# Altium PCB TP-EVALBOARD-R01.PcbDoc (part 1 of 2)
Units mm, origin at the board's own origin, x right, y up, seen from the top; angles counter-clockwise.
Board outline 100.28 x 49.1 mm, 2 copper layers (Top Layer, Bottom Layer), stack 1.695 mm thick; 77 components, 72 nets, 330 pads, 183 vias.
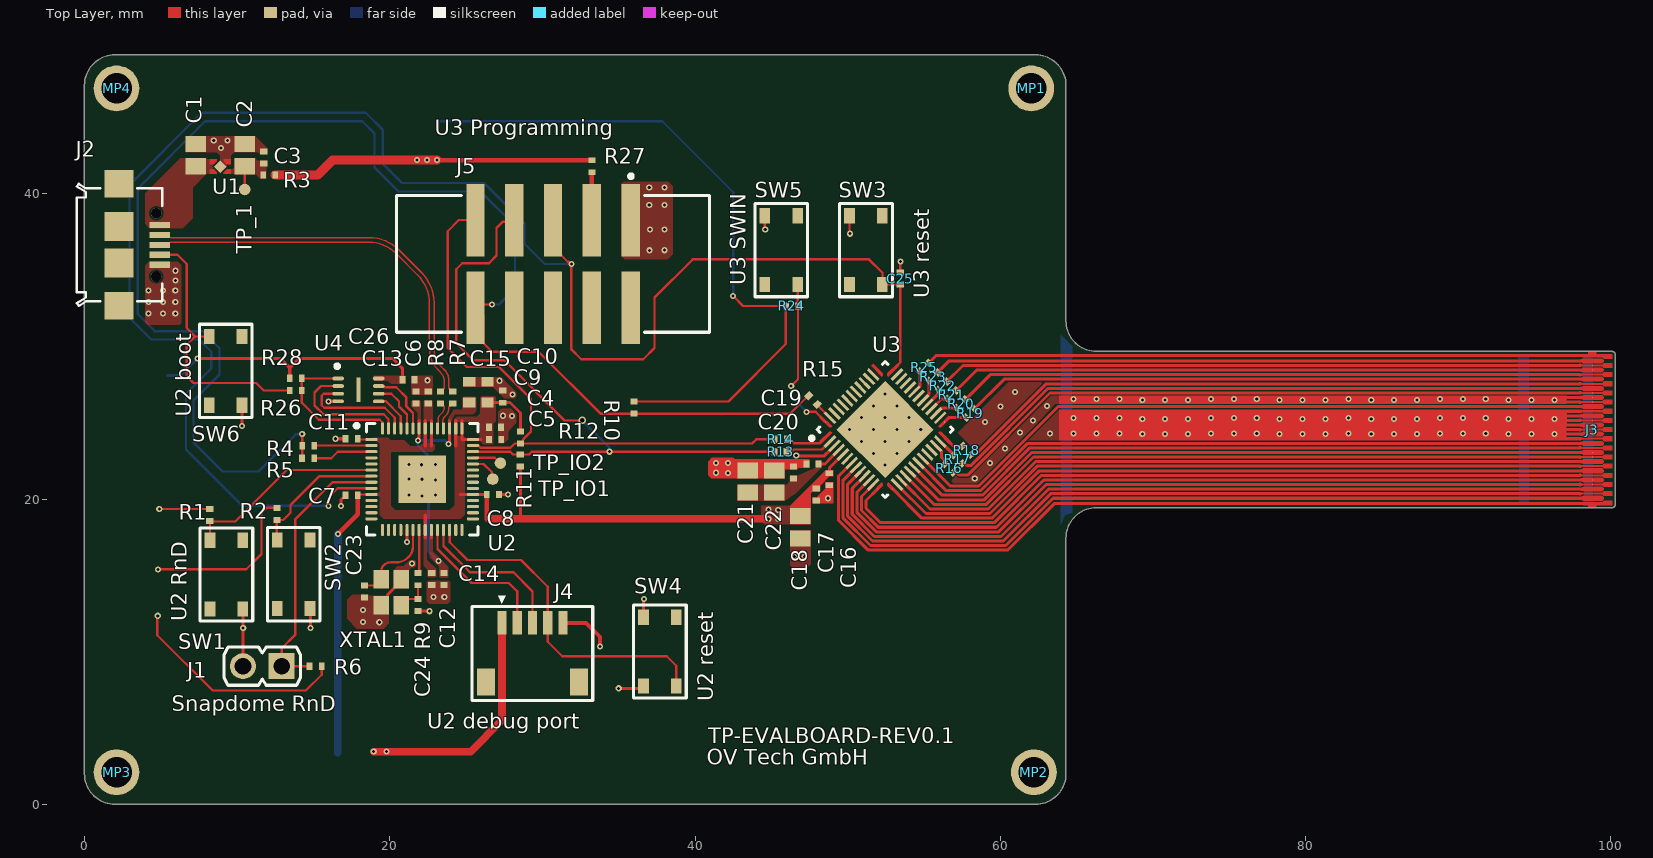
[diagram p0: Top Layer view]
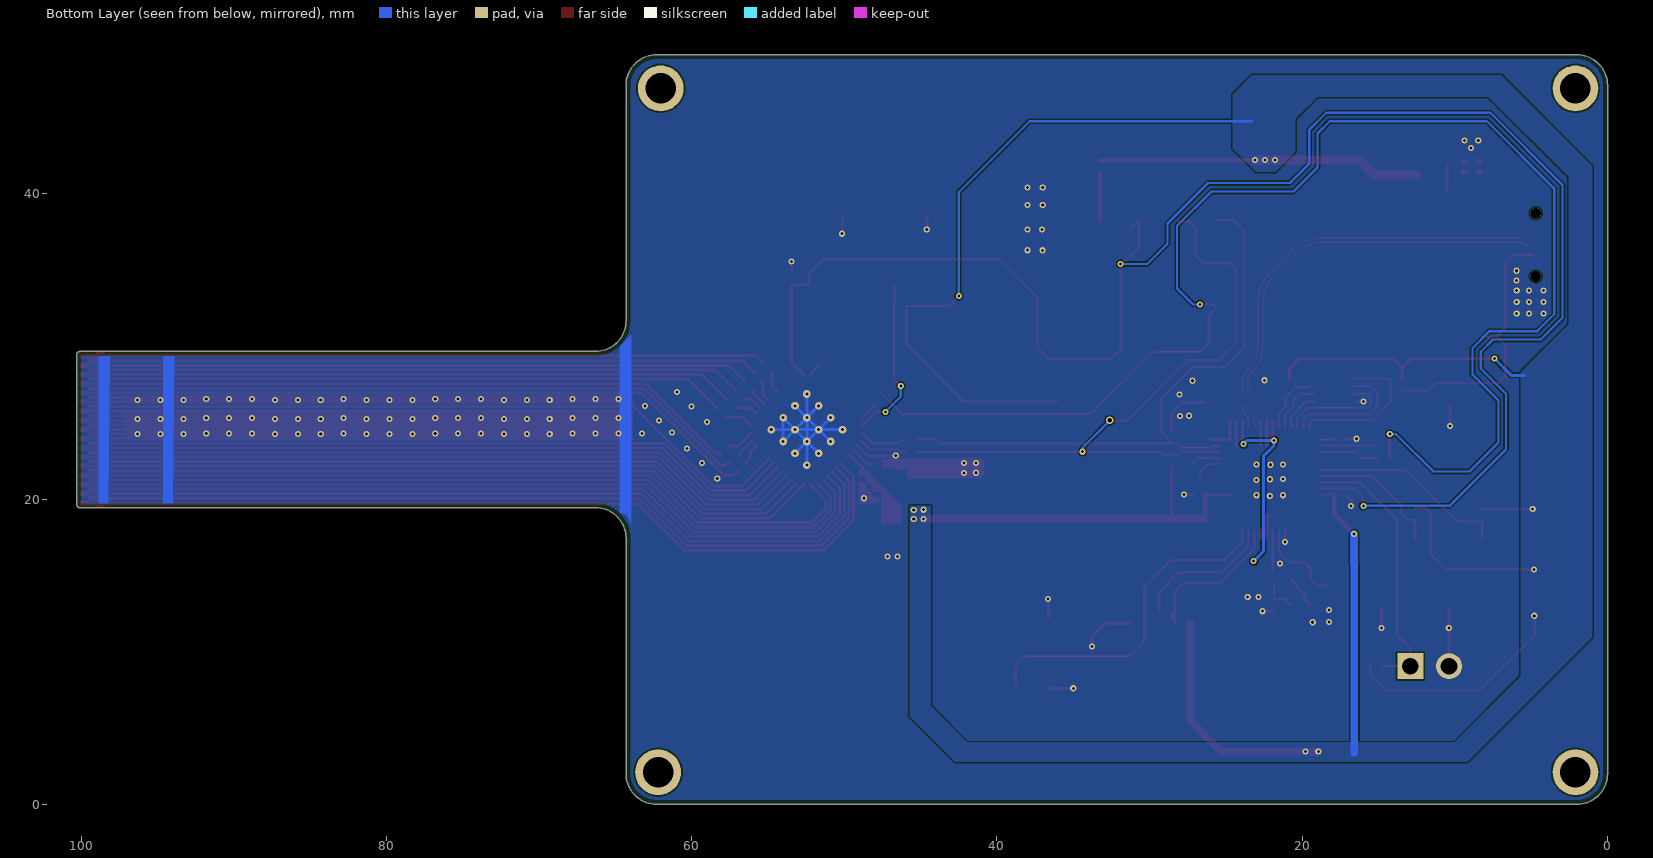
[diagram p1: Bottom Layer view, seen from below]
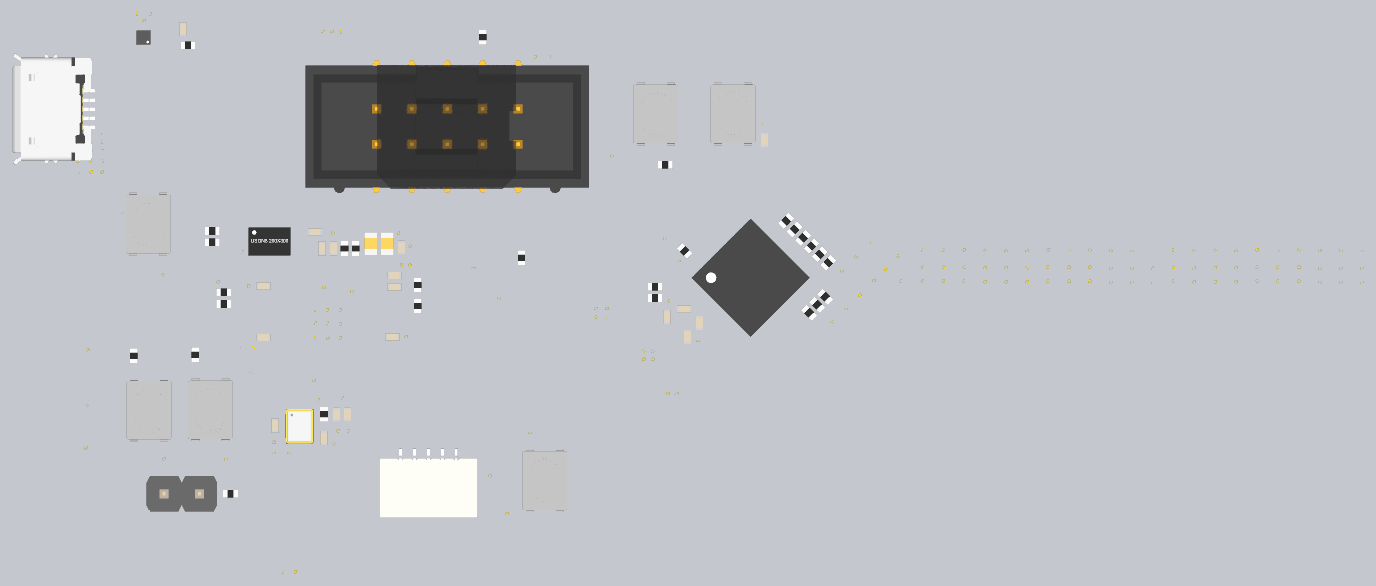
[diagram p3: 3D render of the assembled board from above, using the file's embedded part models]

## Layer stack, top to bottom
Polyimide Top: solder mask 0.025, FC-001, Dk 2.9
Adhesive Top: prepreg 0.25, PP-023, Dk 4.5
Top Layer: signal copper 0.035
Polyimide Core: core 0.025, Core-009, Dk 3.3
Bottom Layer: signal copper 0.035
Adhesive Bottom: prepreg 0.25, PP-023, Dk 4.5
Polyimide Bottom: solder mask 0.025, FC-001, Dk 2.9
Polyimide Stiffener: core 0.1, Core-009, Dk 4.5
FR4 Stiffener: core 1, Core-009, Dk 4.1

## Board outline
100.157,19.445 ccw(c100.08,19.63) 100.28,19.63 100.28,29.47 ccw(c100.08,29.47) 100.08,29.67 94.3,29.67 66.3,29.67 cw(c66.3,31.67) 64.3,31.67 64.3,47.1 ccw(c62.3,47.1) 62.3,49.1 2,49.1 ccw(c2,47.1) 0,47.1 0,2 ccw(c2,2) 2,0 62.3,0 ccw(c62.3,2) 64.3,2 64.3,17.43 cw(c66.3,17.43) 64.7,18.63 cw(c66.3,17.43) 66.3,19.43 94.297,19.43 98.53,19.43 100.08,19.43 ccw(c100.08,19.63)
board region "FFC Cable connector": 94.297,19.43 98.53,19.43 100.08,19.43 100.12,19.43 100.193,19.46 100.25,19.517 100.28,19.59 100.28,19.63 100.28,29.47 100.28,29.51 100.25,29.583 100.193,29.64 100.12,29.67 100.08,29.67 94.3,29.67
board region "FFC Cable": 66.3,19.43 94.297,19.43 94.3,29.67 66.3,29.67 66.104,29.68 65.719,29.756 65.357,29.906 65.031,30.124 64.754,30.401 64.536,30.727 64.386,31.089 64.31,31.474 64.3,31.67 64.3,17.43 64.31,17.626 64.386,18.011 64.536,18.373 64.754,18.699 65.031,18.976 65.357,19.194 65.719,19.344 66.104,19.42
board region Board: 64.3,17.43 64.306,17.591 64.358,17.908 64.46,18.213 64.609,18.498 64.7,18.63 64.603,18.501 64.454,18.215 64.352,17.91 64.3,17.591 64.3,17.43 64.3,31.67 64.3,47.1 64.3,47.297 64.223,47.683 64.072,48.047 63.854,48.375 63.575,48.654 63.247,48.872 62.883,49.023 62.497,49.1 62.3,49.1 2,49.1 1.803,49.1 1.417,49.023 1.053,48.872 0.725,48.654 0.446,48.375 0.228,48.047 0.077,47.683 0,47.297 0,47.1 0,2 0,1.803 0.077,1.417 0.228,1.053 0.446,0.725 0.725,0.447 1.053,0.228 1.417,0.077 1.803,0 2,0 62.3,0 62.497,0 62.883,0.077 63.247,0.228 63.575,0.447 63.854,0.725 64.072,1.053 64.223,1.417 64.3,1.803 64.3,2

## Design rules (kind name [scope] priority, off if disabled: settings)
BoardOutlineClearance [All] p1: gap=0.3 ignorepadtopadclearanceinfootprint=FALSE except(0: Arc-SplitContinuation Track-OutlineEdge Track-SplitContinuation SMDPad-SplitContinuation THPad-SplitContinuation Via-SplitContinuation Fill-SplitContinuation Poly-SplitContinuation Region-OutlineEdge Region-SplitContinuation Text-SplitContinuation; 0.07: SMDPad-OutlineEdge)
Clearance Clearance_Polygon [All] p1 off: gap=0.2 ignorepadtopadclearanceinfootprint=TRUE
Clearance [All] p2: gap=0.1 ignorepadtopadclearanceinfootprint=TRUE except(0.09: Arc-Fill Arc-Poly Arc-Region Track-Fill Track-Poly Track-Region Fill-Fill Fill-Poly Fill-Region Poly-Poly Poly-Region Region-Region)
ComponentClearance [All] p1: gap=0.25 collisioncheckmode=3 verticalgap=0.25 showdistances=FALSE
DiffPairsRouting [All] p1: maxlimit=0.254 minlimit=0.1 mostfreqgap=0.254 substack1={A5803DA3-43D9-44B9-9D02-681CBD6EEB39} toplayer_{a5803da3-43d9-44b9-9d02-681cbd6eeb39}_mingap=0.127 toplayer_{a5803da3-43d9-44b9-9d02-681cbd6eeb39}_maxgap=0.127 toplayer_{a5803da3-43d9-44b9-9d02-681cbd6eeb39}_prefgap=0.127 toplayer_{a5803da3-43d9-44b9-9d02-681cbd6eeb39}_minwidth=0.022 toplayer_{a5803da3-43d9-44b9-9d02-681cbd6eeb39}_maxwidth=0.022 toplayer_{a5803da3-43d9-44b9-9d02-681cbd6eeb39}_prefwidth=0.022 bottomlayer_{a5803da3-43d9-44b9-9d02-681cbd6eeb39}_mingap=0.127 bottomlayer_{a5803da3-43d9-44b9-9d02-681cbd6eeb39}_maxgap=0.127 bottomlayer_{a5803da3-43d9-44b9-9d02-681cbd6eeb39}_prefgap=0.127 bottomlayer_{a5803da3-43d9-44b9-9d02-681cbd6eeb39}_minwidth=0.022 bottomlayer_{a5803da3-43d9-44b9-9d02-681cbd6eeb39}_maxwidth=0.022 bottomlayer_{a5803da3-43d9-44b9-9d02-681cbd6eeb39}_prefwidth=0.022 toplayer_mingap=0.2 toplayer_maxgap=0.2 toplayer_prefgap=0.2 toplayer_minwidth=0.1 toplayer_maxwidth=0.1 toplayer_prefwidth=0.1 substack2={84C3CAF8-51C1-4DF7-91C9-D4917629455C} toplayer_{84c3caf8-51c1-4df7-91c9-d4917629455c}_mingap=0.127 toplayer_{84c3caf8-51c1-4df7-91c9-d4917629455c}_maxgap=0.127 toplayer_{84c3caf8-51c1-4df7-91c9-d4917629455c}_prefgap=0.127 toplayer_{84c3caf8-51c1-4df7-91c9-d4917629455c}_minwidth=0.1 toplayer_{84c3caf8-51c1-4df7-91c9-d4917629455c}_maxwidth=0.1 toplayer_{84c3caf8-51c1-4df7-91c9-d4917629455c}_prefwidth=0.1 substack3={38ED5E12-83FA-4B19-B921-58C7BFAB71A2} toplayer_{38ed5e12-83fa-4b19-b921-58c7bfab71a2}_mingap=0.127 toplayer_{38ed5e12-83fa-4b19-b921-58c7bfab71a2}_maxgap=0.127 toplayer_{38ed5e12-83fa-4b19-b921-58c7bfab71a2}_prefgap=0.127 toplayer_{38ed5e12-83fa-4b19-b921-58c7bfab71a2}_minwidth=0.022 toplayer_{38ed5e12-83fa-4b19-b921-58c7bfab71a2}_maxwidth=0.022 toplayer_{38ed5e12-83fa-4b19-b921-58c7bfab71a2}_prefwidth=0.022 bottomlayer_{38ed5e12-83fa-4b19-b921-58c7bfab71a2}_mingap=0.127 bottomlayer_{38ed5e12-83fa-4b19-b921-58c7bfab71a2}_maxgap=0.127 bottomlayer_{38ed5e12-83fa-4b19-b921-58c7bfab71a2}_prefgap=0.127 bottomlayer_{38ed5e12-83fa-4b19-b921-58c7bfab71a2}_minwidth=0.022 bottomlayer_{38ed5e12-83fa-4b19-b921-58c7bfab71a2}_maxwidth=0.022 bottomlayer_{38ed5e12-83fa-4b19-b921-58c7bfab71a2}_prefwidth=0.022 substack4={09A6A07F-A3A5-4693-AABE-62769E27871C} toplayer_{09a6a07f-a3a5-4693-aabe-62769e27871c}_mingap=0.127 toplayer_{09a6a07f-a3a5-4693-aabe-62769e27871c}_maxgap=0.127 toplayer_{09a6a07f-a3a5-4693-aabe-62769e27871c}_prefgap=0.127 toplayer_{09a6a07f-a3a5-4693-aabe-62769e27871c}_minwidth=0.022 toplayer_{09a6a07f-a3a5-4693-aabe-62769e27871c}_maxwidth=0.022 toplayer_{09a6a07f-a3a5-4693-aabe-62769e27871c}_prefwidth=0.022 bottomlayer_{09a6a07f-a3a5-4693-aabe-62769e27871c}_mingap=0.127 bottomlayer_{09a6a07f-a3a5-4693-aabe-62769e27871c}_maxgap=0.127 bottomlayer_{09a6a07f-a3a5-4693-aabe-62769e27871c}_prefgap=0.127 bottomlayer_{09a6a07f-a3a5-4693-aabe-62769e27871c}_minwidth=0.022 bottomlayer_{09a6a07f-a3a5-4693-aabe-62769e27871c}_maxwidth=0.022 bottomlayer_{09a6a07f-a3a5-4693-aabe-62769e27871c}_prefwidth=0.022 substack5={1D935209-171D-4198-AE0C-507DB6D7A4E7} toplayer_{1d935209-171d-4198-ae0c-507db6d7a4e7}_mingap=0.127 toplayer_{1d935209-171d-4198-ae0c-507db6d7a4e7}_maxgap=0.127 toplayer_{1d935209-171d-4198-ae0c-507db6d7a4e7}_prefgap=0.127 toplayer_{1d935209-171d-4198-ae0c-507db6d7a4e7}_minwidth=0.022 toplayer_{1d935209-171d-4198-ae0c-507db6d7a4e7}_maxwidth=0.022 toplayer_{1d935209-171d-4198-ae0c-507db6d7a4e7}_prefwidth=0.022 bottomlayer_{1d935209-171d-4198-ae0c-507db6d7a4e7}_mingap=0.127 bottomlayer_{1d935209-171d-4198-ae0c-507db6d7a4e7}_maxgap=0.127 bottomlayer_{1d935209-171d-4198-ae0c-507db6d7a4e7}_prefgap=0.127 bottomlayer_{1d935209-171d-4198-ae0c-507db6d7a4e7}_minwidth=0.022 bottomlayer_{1d935209-171d-4198-ae0c-507db6d7a4e7}_maxwidth=0.022 bottomlayer_{1d935209-171d-4198-ae0c-507db6d7a4e7}_prefwidth=0.022 impedanceprofiledriven=TRUE impedanceprofileid={C825E937-8A85-4596-8515-0E980C5BF0B9} impedanceprofilevalue=90.000000 filterlayerstackid={9A772E83-2D58-47FA-AC51-64F28B5B47A1} maxuncoupledlength=12.7
HoleSize HoleSize_Via [IsVia] p1: absolutevalues=TRUE maxlimit=6.3 minlimit=0.2 maxpercent=80.000 minpercent=20.000
HoleSize HoleSize_Pad [IsPad] p2: absolutevalues=TRUE maxlimit=6.3 minlimit=0.5 maxpercent=80.000 minpercent=20.000
HoleSize HoleSize_General [All] p3: absolutevalues=TRUE maxlimit=6.3 minlimit=0.3 maxpercent=80.000 minpercent=20.000
HoleToHoleClearance HoleToHoleClearance_Via [isVia] p1: gap=0.254 allowstackedmicrovias=TRUE
HoleToHoleClearance HoleToHoleClearance_General [All] p2: gap=0.5 allowstackedmicrovias=TRUE
MinimumAnnularRing MinimumAnnularRing_Pad [IsPad] p1: minimumring=0.25
MinimumAnnularRing MinimumAnnularRing_Via [IsVia] p2: minimumring=0.1
MinimumAnnularRing MinimumAnnularRing_General [not isVia] p3: minimumring=0.2
MinimumSolderMaskSliver [All] p1: minsoldermaskwidth=0.1
PolygonConnect PolygonConnect_Power [InNet('VREG') or InNet('3V3') or InNet('GND') or InNet('3V3_REG') or InNet('VBUS') or InNet('VREG_VOUT')] p1: connectstyle=Direct reliefconductorwidth=0.254 reliefentries=4 polygonreliefangle="90 Angle" airgapwidth=0.254
PolygonConnect [All] p2: connectstyle=Relief reliefconductorwidth=0.254 reliefentries=4 polygonreliefangle="90 Angle" airgapwidth=0.254
RoutingVias [All] p1: holewidth=0.3 width=0.5 viastyle="Through Hole" minholewidth=0.2 minwidth=0.4 maxholewidth=6.3 maxwidth=6.8
SilkToSilkClearance [All] p1: silktosilkclearance=0.15
SilkToSolderMaskClearance [IsPad] p1: minsilkscreentomaskgap=0.15 clearancetoexposedcopper=TRUE
SolderMaskExpansion [All] p1: expansion=0.038 istentingtop=FALSE
SupplyNets "Schematic Supply Nets_1" [InNet('VBUS')] p1: voltage=0.000
SupplyNets "Schematic Supply Nets_2" [InNet('GND')] p2: voltage=0.000
SupplyNets "Schematic Supply Nets_3" [InNet('3V3')] p3: voltage=0.000
Width [All] p1: maxlimit=10 minlimit=0.102 preferedwidth=0.15 substack1={A5803DA3-43D9-44B9-9D02-681CBD6EEB39} toplayer_{a5803da3-43d9-44b9-9d02-681cbd6eeb39}_prefwidth=0.2 bottomlayer_{a5803da3-43d9-44b9-9d02-681cbd6eeb39}_prefwidth=0.2 substack2={84C3CAF8-51C1-4DF7-91C9-D4917629455C} toplayer_{84c3caf8-51c1-4df7-91c9-d4917629455c}_prefwidth=0.2 bottomlayer_{84c3caf8-51c1-4df7-91c9-d4917629455c}_prefwidth=0.2 substack3={38ED5E12-83FA-4B19-B921-58C7BFAB71A2} substack4={09A6A07F-A3A5-4693-AABE-62769E27871C} toplayer_{09a6a07f-a3a5-4693-aabe-62769e27871c}_prefwidth=0.2 bottomlayer_{09a6a07f-a3a5-4693-aabe-62769e27871c}_prefwidth=0.2 substack5={1D935209-171D-4198-AE0C-507DB6D7A4E7} toplayer_{1d935209-171d-4198-ae0c-507db6d7a4e7}_prefwidth=0.2 bottomlayer_{1d935209-171d-4198-ae0c-507db6d7a4e7}_prefwidth=0.2
23 further rules are at their usual default settings.

## Classes and differential pairs
differential pair class DIFF90: USB_D USB_MCU_D
component class TP-EVALBOARD: C1 C2 C3 C4 C5 C6 C7 C8 C9 C11 C12 C13 C14 C15 C16 C17 C18 C19 C20 C21 C22 C23 C24 C25 C26 J5 MP1 MP2 MP3 MP4 R1 R2 R3 R4 R5 R6 R7 R8 R9 R10 R11 R12 R13 R14 R16 R17 R18 R19 R20 R21 R22 R24 R25 R26 R27 R28 SW1 SW2 SW3 SW4 SW5 SW6 TP_1 TP_IO1 TP_IO2 U1 U2 U3 U4 XTAL1
differential pair USB_MCU_D: +USB_MCU_D_P -USB_MCU_D_N
differential pair USB_D: +USB_D_P -USB_D_N

## Components (designator, comment, footprint, x,y, rotation, side; value= is the part's Value field where it differs from the comment)
C1 "10µF 16V" CAPC2012X14L 7.3,42.525 r90 top
C2 "10µF 16V" CAPC2012X14L 10.5,42.525 r90 top
C3 "100nF 25V" CAPC1005X06L 11.75,42.38 r90 top
C4 "100nF 25V" CAPC1005X06L 26.9,24.7 r0 top
C5 "100nF 25V" CAPC1005X06L 26.905,23.9 r0 top
C6 "100nF 25V" CAPC1005X06L 22.525,26.65 r90 top
C7 "100nF 25V" CAPC1005X06L 17.505,20.25 r180 top
C8 "100nF 25V" CAPC1005X06L 26.755,20.3 r0 top
C9 "1µF 16V" CAPC1608X10L 26.401,27 r90 top
C10 "100nF 25V" CAPC1005X06L 27.4,26.705 r90 top
C11 "100nF 25V" CAPC1005X06L 17.505,23.95 r180 top
C12 "100nF 25V" CAPC1005X06L 22.75,14.755 r270 top
C13 "100nF 25V" CAPC1005X06L 21.725,26.65 r90 top
C14 "100nF 25V" CAPC1005X06L 23.55,14.755 r270 top
C15 "1µF 16V" CAPC1608X10L 25.203,27 r90 top
C16 "100pF 50V" CAPC1005X06L 48.8,21.295 r270 top
C17 "100nF 25V" CAPC1005X06L 47.95,20.3 r270 top
C18 "22µF 25V" CAPC2012X14L 46.9,18.15 r270 top
C19 "100pF 50V" CAPC1005X06L 47.695,22.3 r180 top
C20 "100nF 25V" CAPC1005X06L 46.45,21.745 r90 top
C21 "22µF 25V" CAPC2012X14L 43.45,21.15 r90 top
C22 "22µF 25V" CAPC2012X14L 45.2,21.15 r90 top
C23 "13pF 50V" CAPC1005X06L 18.35,13.945 r270 top
C24 "13pF 50V" CAPC1005X06L 21.852,13.055 r270 top
C25 "100nF 25V" CAPC1005X06L 53.45,34.445 r90 top
C26 "100nF 25V" CAPC1005X06L 21.222,27.819 r0 top
J1 "61300211121" "Pin Header 2Pol 61300211121" 11.65,9.05 r180 top
J2 "629105136821" "USB-TYPE MICRO B_629105136821" 2.25,36.65 r270 top
J3 "FFC receptable" WIRE-TO-BOARD_RECEPTABLE_FH35C-33S-0.3SHW(50) 98.78,24.55 r270 top
J4 "SM05B-SRSS-TB" "Wire-to-Board SM05B-SRSS-TB" 29.35,9.95 r180 top
J5 "61231020621" WIRE-TO-BOARD_WE_61231020621 30.7,35.4 r180 top
MP1 "MP_MOUNT_2MM" MP_2MM#1 62.3,46.9 r0 top
MP2 "MP_MOUNT_2MM" MP_2MM#2 62.03,2 r0 top
MP3 "MP_MOUNT_2MM" MP_2MM#3 -36.42,2.1 r0 top
MP4 "MP_MOUNT_2MM" MP_2MM#4 -35.97,46.9 r0 top
R1 "1k 1%" RESC1005X04L 8.2,18.95 r270 top
R2 "1k 1%" RESC1005X04L 12.613,19.024 r270 top
R3 "0Ohm 1%" RESC1005X04L 12.105,41.225 r0 top
R4 "0Ohm 1%" RESC1005X04L 14.66,23.5 r180 top
R5 "0Ohm 1%" RESC1005X04L 14.654,22.666 r180 top
R6 "1k 1%" RESC1005X04L 15.145,9.05 r0 top
R7 "27R 1%" RESC1005X04L 24.125,26.65 r270 top
R8 "27R 1%" RESC1005X04L 23.325,26.65 r270 top
R9 "1k 1%" RESC1005X04L 21.85,14.75 r90 top
R10 "4k7 1%" RESC1005X04L 36,25.99 r90 top
R11 "4k7 1%" RESC1005X04L 28.559,22.528 r270 top
R12 "4k7 1%" RESC1005X04L 28.564,24.035 r90 top
R13 "100R 1%" RESC1005X04L 45.605,23.1 r0 top
R14 "100R 1%" RESC1005X04L 45.608,23.907 r0 top
R15 "100R 1%" RESC1005X04L 47.729,26.484 r315 top
R16 "100R 1%" RESC1005X04L 56.651,22.032 r315 top
R17 "100R 1%" RESC1005X04L 57.222,22.612 r315 top
R18 "100R 1%" RESC1005X04L 57.801,23.182 r315 top
R19 "100R 1%" RESC1005X04L 58.029,25.629 r45 top
R20 "100R 1%" RESC1005X04L 57.429,26.229 r45 top
R21 "100R 1%" RESC1005X04L 56.829,26.829 r45 top
R22 "100R 1%" RESC1005X04L 56.221,27.421 r45 top
R23 "100R 1%" RESC1005X04L 55.621,28.021 r45 top
R24 "4k7 1%" RESC1005X04L 46.345,32.65 r180 top
R25 "100R 1%" RESC1005X04L 55.021,28.621 r45 top
R26 "1k 1%" RESC1005X04L 13.84,27.104 r0 top
R27 "0Ohm 1%" RESC1005X04L 33.25,41.8 r270 top
R28 "10k 1% DNP" RESC1005X04L 13.845,27.904 r0 top
SW1 "PTS815 SJM 250 SMTR LFS" "SW_TACT_PTS815 SJM 250 SMTR LFS" 9.3,15.05 r270 top
SW2 "PTS815 SJM 250 SMTR LFS" "SW_TACT_PTS815 SJM 250 SMTR LFS" 13.707,15.071 r270 top
SW3 "PTS815 SJM 250 SMTR LFS" "SW_TACT_PTS815 SJM 250 SMTR LFS" 51.2,36.3 r90 top
SW4 "PTS815 SJM 250 SMTR LFS" "SW_TACT_PTS815 SJM 250 SMTR LFS" 37.7,10 r90 top
SW5 "PTS815 SJM 250 SMTR LFS" "SW_TACT_PTS815 SJM 250 SMTR LFS" 45.65,36.3 r90 top
SW6 "PTS815 SJM 250 SMTR LFS" "SW_TACT_PTS815 SJM 250 SMTR LFS" 9.25,28.4 r270 top
TP_1 "Testpoint 0.75mm" TP_0.75mm 10.5,40.275 r180 top
TP_IO1 "Testpoint 0.75mm" TP_0.75mm 26.75,21.3 r90 top
TP_IO2 "Testpoint 0.75mm" TP_0.75mm 27.25,22.35 r90 top
U1 "TLV74033PDQNR" X2SON-DFN 8.9,41.775 r180 top
U2 "RP2040" QFN40P700X700X90_HS-57L 22.125,21.3 r0 top
U3 "IQS9150" QFN40P600X600X80_HS-53M 52.455,24.55 r45 top
U4 "W25Q16JVUXIQ" QFN50P300X200X60_HS-9L 17.95,27.15 r0 top
XTAL1 "ECX-2236B" XTAL_ECX-2236B2_250X200X60 20.1,13.9 r270 top

## Footprints (in the part's own frame and the unit in brackets; to place one, negate y for a bottom-side part, rotate by r counter-clockwise, add the part's x,y. Pads: shape width x height; smd on the part's side, far side on the other; paste and mask are expansions set on the pad)
CAPC1005X06L [mm] "Chip Capacitor, 2-Leads, Body 1,00x0,50mm, IPC High Density"
  rect 0.38x0.48 smd: 1(-0.395,0) 2(0.395,0)
  body extent -0.5,-0.25 0.5,0.25, height 0.5
CAPC1608X10L [mm] "Chip Capacitor, 2-Leads, Body 1,60x0,80mm, IPC High Density"
  rect 0.63x0.8 smd: 1(-0.675,0) 2(0.675,0)
  body extent -0.8,-0.45 0.8,0.45, height 0.8
CAPC2012X14L [mm] "Chip Capacitor, 2-Leads, Body 2,00x1,25mm, IPC High Density"
  rect 1.05x1.35 smd: 1(-0.725,0) 2(0.725,0)
  body extent -1.1,-0.72 1.1,0.72, height 1.25
MP_2MM#1 [mm] "Mounting hole with 2mm hole diameter"
  round 3 hole 2: 4(-0.27,0)
MP_2MM#2 [mm] "Mounting hole with 2mm hole diameter"
  round 3 hole 2: 4(0.17,0.1)
MP_2MM#3 [mm] "Mounting hole with 2mm hole diameter"
  round 3 hole 2: 4(38.52,0)
MP_2MM#4 [mm] "Mounting hole with 2mm hole diameter"
  round 3 hole 2: 4(38.07,0)
"Pin Header 2Pol 61300211121" [mm] "WR-PHD 2.54mm 2Pin THT Header"
  rect 1.7x1.7 hole 1.1: 1(-1.27,0)
  round 1.7 hole 1.1: 2(1.27,0)
  silkscreen extent -2.5,-1.25 2.5,1.25, body extent -2.54,-1.27 2.54,1.27, height 8.54
QFN40P600X600X80_HS-53M [mm] "QFN, 52-Leads, Body 6,00x6,00mm, Pitch 0,40mm, Thermal Pad 4,50x4,50mm, IPC Low Density"
  round 0.025 smd: 1(-3.1,2.4) 13(-3.1,-2.4) 14(-2.4,-3.1) 26(2.4,-3.1) 27(3.1,-2.4) 39(3.1,2.4) 40(2.4,3.1) 52(-2.4,3.1)
  rect 1x0.2 smd: 2(-3.1,2) 3(-3.1,1.6) 4(-3.1,1.2) 5(-3.1,0.8) 6(-3.1,0.4) 7(-3.1,0) 8(-3.1,-0.4) 9(-3.1,-0.8) 10(-3.1,-1.2) 11(-3.1,-1.6) 12(-3.1,-2) 28(3.1,-2) 29(3.1,-1.6) 30(3.1,-1.2) 31(3.1,-0.8) 32(3.1,-0.4) 33(3.1,0) 34(3.1,0.4) 35(3.1,0.8) 36(3.1,1.2) 37(3.1,1.6) 38(3.1,2)
  rect 0.2x1 smd: 15(-2,-3.1) 16(-1.6,-3.1) 17(-1.2,-3.1) 18(-0.8,-3.1) 19(-0.4,-3.1) 20(0,-3.1) 21(0.4,-3.1) 22(0.8,-3.1) 23(1.2,-3.1) 24(1.6,-3.1) 25(2,-3.1) 41(2,3.1) 42(1.6,3.1) 43(1.2,3.1) 44(0.8,3.1) 45(0.4,3.1) 46(0,3.1) 47(-0.4,3.1) 48(-0.8,3.1) 49(-1.2,3.1) 50(-1.6,3.1) 51(-2,3.1)
  rect 4.5x4.5 smd: 53(0,0)
  Top Layer region: -3.6,-2.5 -2.7,-2.5 -2.6,-2.4 -2.6,-2.3 -3.6,-2.3
  Top Layer region: 2.3,3.6 2.3,2.6 2.4,2.6 2.5,2.7 2.5,3.6
  Top Layer region: -2.4,-2.6 -2.5,-2.7 -2.5,-3.6 -2.3,-3.6 -2.3,-2.6
  Top Layer region: 2.6,2.4 2.6,2.3 3.6,2.3 3.6,2.5 2.7,2.5
  Top Layer region: -2.5,3.6 -2.5,2.7 -2.4,2.6 -2.3,2.6 -2.3,3.6
  Top Layer region: -3.6,2.3 -2.6,2.3 -2.6,2.4 -2.7,2.5 -3.6,2.5
  Top Layer region: 2.6,-2.4 2.7,-2.5 3.6,-2.5 3.6,-2.3 2.6,-2.3
  Top Layer region: 2.3,-2.6 2.3,-3.6 2.5,-3.6 2.5,-2.7 2.4,-2.6
  silkscreen extent -3.92,-3.15 3.15,3.15, body extent -3,-3 3,3, height 0.8
QFN40P700X700X90_HS-57L [mm] "QFN, 56-Leads, Body 7,00x7,00mm, Pitch 0,40mm, Thermal Pad 3,10x3,10mm, IPC High Density"
  oval 0.8x0.2 smd: 1(-3.325,2.6) 2(-3.325,2.2) 3(-3.325,1.8) 4(-3.325,1.4) 5(-3.325,1) 6(-3.325,0.6) 7(-3.325,0.2) 8(-3.325,-0.2) 9(-3.325,-0.6) 10(-3.325,-1) 11(-3.325,-1.4) 12(-3.325,-1.8) 13(-3.325,-2.2) 14(-3.325,-2.6) 29(3.325,-2.6) 30(3.325,-2.2) 31(3.325,-1.8) 32(3.325,-1.4) 33(3.325,-1) 34(3.325,-0.6) 35(3.325,-0.2) 36(3.325,0.2) 37(3.325,0.6) 38(3.325,1) 39(3.325,1.4) 40(3.325,1.8) 41(3.325,2.2) 42(3.325,2.6)
  oval 0.2x0.8 smd: 15(-2.6,-3.325) 16(-2.2,-3.325) 17(-1.8,-3.325) 18(-1.4,-3.325) 19(-1,-3.325) 20(-0.6,-3.325) 21(-0.2,-3.325) 22(0.2,-3.325) 23(0.6,-3.325) 24(1,-3.325) 25(1.4,-3.325) 26(1.8,-3.325) 27(2.2,-3.325) 28(2.6,-3.325) 43(2.6,3.325) 44(2.2,3.325) 45(1.8,3.325) 46(1.4,3.325) 47(1,3.325) 48(0.6,3.325) 49(0.2,3.325) 50(-0.2,3.325) 51(-0.6,3.325) 52(-1,3.325) 53(-1.4,3.325) 54(-1.8,3.325) 55(-2.2,3.325) 56(-2.6,3.325)
  rect 3.1x3.1 smd paste-2539.97: 57(0,0)
  silkscreen extent -4.42,-3.65 3.65,3.65, body extent -3.5,-3.5 3.5,3.5, height 0.9
QFN50P300X200X60_HS-9L [mm] "QFN, 8-Leads, Body 3,00x2,00mm, Pitch 0,50mm, Thermal Pad 0,20x1,60mm, IPC High Density"
  oval 0.75x0.25 smd: 1(-1.325,0.75) 2(-1.325,0.25) 3(-1.325,-0.25) 4(-1.325,-0.75) 5(1.325,-0.75) 6(1.325,-0.25) 7(1.325,0.25) 8(1.325,0.75)
  rect 0.25x1.6 smd: 9(0,0)
  silkscreen extent -1.52,1.43 -1.27,1.67, body extent -1.5,-1 1.5,1, height 0.58
RESC1005X04L [mm] "Chip Resistor, 2-Leads, Body 1,00x0,53mm, IPC High Density"
  rect 0.38x0.48 smd: 1(-0.395,0) 2(0.395,0)
  body extent -0.52,-0.27 0.53,0.28, height 0.4
"SW_TACT_PTS815 SJM 250 SMTR LFS" [mm] "PTS815 SJM 250 SMTR LFS"
  rect 1x0.7 smd: 1(-2.25,-1.075) 2(2.25,-1.075) 3(-2.25,1.075) 4(2.25,1.075)
  silkscreen extent -3.05,-1.73 3.05,1.73, body extent -2.25,-1.6 2.25,1.6, height 2.5
TP_0.75mm [mm] "Testpoint 0.75mm diameter"
  round 0.75 smd paste-1 mask-1: TP(0,0)
  body extent -0.3,-0.3 0.3,0.3, height 0.1
"USB-TYPE MICRO B_629105136821" [mm] "Micro USB 2.0 SMT Type B Horizontal 5 Contacts"
  rect 0.4x1.35 smd: 1(-1.3,2.675) 2(-0.65,2.675) 3(0,2.675) 4(0.65,2.675) 5(1.3,2.675)
  round 0.7 hole 0.7 unplated: MH1(-2.075,2.45) MH2(2.075,2.45)
  rect 1.8x1.9 smd: Shell(-4,0) Shell(4,0)
  rect 1.9x1.9 smd: Shell(-1.2,0) Shell(1.2,0)
  silkscreen extent -4,-2.75 4,2.85, body extent -4,-2.73 4,3.17, height 2.69
"Wire-to-Board SM05B-SRSS-TB" [mm] "Termination Type:Surface Mount Right Angle; Product Range:Sr Series Rohs Compliant: Yes"
  rect 0.6x1.55 smd: 1(2,-1.937) 2(1,-1.937) 3(0,-1.937) 4(-1,-1.937) 5(-2,-1.937)
  rect 1.2x1.8 smd: MT(-3.05,1.938) MT(3.05,1.938)
  silkscreen extent -3.95,-3.7 3.95,3.15, body extent -3.5,-2.34 3.5,2.61, height 2.9
WIRE-TO-BOARD_RECEPTABLE_FH35C-33S-0.3SHW(50) [mil]
  round 1 smd paste-99999: 1(192.91,0) 2(177.17,0) 3(165.35,0) 4(153.54,0) 5(141.73,0) 6(129.92,0) 7(118.11,0) 8(106.3,0) 9(94.49,0) 10(82.68,0) 11(70.87,0) 12(59.06,0) 13(47.24,0) 14(35.43,0) 15(23.62,0) 16(11.81,0) 17(0,0) 18(-11.81,0) 19(-23.62,0) 20(-35.43,0) 21(-47.24,0) 22(-59.06,0) 23(-70.87,0) 24(-82.68,0) 25(-94.49,0) 26(-106.3,0) 27(-118.11,0) 28(-129.92,0) 29(-141.73,0) 30(-153.54,0) 31(-165.35,0) 32(-177.17,0) 33(-192.91,0)
  Top Layer region: 84.65,29.53 80.71,29.53 76.77,25.59 76.77,-9.84 88.58,-9.84 88.58,25.59
  Top Layer region: 64.96,51.18 64.96,29.53 68.9,25.59 68.9,-9.84 72.83,-9.84 72.83,25.59 76.77,29.53 76.77,51.18
  Top Layer region: 61.02,29.53 57.09,29.53 53.15,25.59 53.15,-9.84 64.96,-9.84 64.96,25.59
  Top Layer region: 41.34,51.18 41.34,29.53 45.28,25.59 45.28,-9.84 49.21,-9.84 49.21,25.59 53.15,29.53 53.15,51.18
  Top Layer region: 37.4,29.53 33.46,29.53 29.53,25.59 29.53,-9.84 41.34,-9.84 41.34,25.59
  Top Layer region: 17.72,51.18 17.72,29.53 21.65,25.59 21.65,-9.84 25.59,-9.84 25.59,25.59 29.53,29.53 29.53,51.18
  Top Layer region: 13.78,29.53 9.84,29.53 5.91,25.59 5.91,-9.84 17.72,-9.84 17.72,25.59
  Top Layer region: -5.91,51.18 -5.91,29.53 -1.97,25.59 -1.97,-9.84 1.97,-9.84 1.97,25.59 5.91,29.53 5.91,51.18
  Top Layer region: 179.13,29.53 175.2,29.53 171.26,25.59 171.26,-9.84 183.07,-9.84 183.07,25.59
  Top Layer region: 159.45,51.18 159.45,29.53 163.39,25.59 163.39,-9.84 167.32,-9.84 167.32,25.59 171.26,29.53 171.26,51.18
  Top Layer region: 155.51,29.53 151.57,29.53 147.64,25.59 147.64,-9.84 159.45,-9.84 159.45,25.59
  Top Layer region: 135.83,51.18 135.83,29.53 139.76,25.59 139.76,-9.84 143.7,-9.84 143.7,25.59 147.64,29.53 147.64,51.18
  Top Layer region: 131.89,29.53 127.95,29.53 124.02,25.59 124.02,-9.84 135.83,-9.84 135.83,25.59
  Top Layer region: 112.2,51.18 112.2,29.53 116.14,25.59 116.14,-9.84 120.08,-9.84 120.08,25.59 124.02,29.53 124.02,51.18
  Top Layer region: 108.27,29.53 104.33,29.53 100.39,25.59 100.39,-9.84 112.2,-9.84 112.2,25.59
  Top Layer region: 88.58,51.18 88.58,29.53 92.52,25.59 92.52,-9.84 96.46,-9.84 96.46,25.59 100.39,29.53 100.39,51.18
  Top Layer region: -100.39,51.18 -100.39,29.53 -96.46,25.59 -96.46,-9.84 -92.52,-9.84 -92.52,25.59 -88.58,29.53 -88.58,51.18
  Top Layer region: -80.71,29.53 -84.65,29.53 -88.58,25.59 -88.58,-9.84 -76.77,-9.84 -76.77,25.59
  Top Layer region: -76.77,51.18 -76.77,29.53 -72.83,25.59 -72.83,-9.84 -68.9,-9.84 -68.9,25.59 -64.96,29.53 -64.96,51.18
  Top Layer region: -57.09,29.53 -61.02,29.53 -64.96,25.59 -64.96,-9.84 -53.15,-9.84 -53.15,25.59
  Top Layer region: -53.15,51.18 -53.15,29.53 -49.21,25.59 -49.21,-9.84 -45.28,-9.84 -45.28,25.59 -41.34,29.53 -41.34,51.18
  Top Layer region: -33.46,29.53 -37.4,29.53 -41.34,25.59 -41.34,-9.84 -29.53,-9.84 -29.53,25.59
  Top Layer region: -29.53,51.18 -29.53,29.53 -25.59,25.59 -25.59,-9.84 -21.65,-9.84 -21.65,25.59 -17.72,29.53 -17.72,51.18
  Top Layer region: -9.84,29.53 -13.78,29.53 -17.72,25.59 -17.72,-9.84 -5.91,-9.84 -5.91,25.59
  Top Layer region: -175.2,29.53 -179.13,29.53 -183.07,25.59 -183.07,-9.84 -171.26,-9.84 -171.26,25.59
  Top Layer region: -171.26,51.18 -171.26,29.53 -167.32,25.59 -167.32,-9.84 -163.39,-9.84 -163.39,25.59 -159.45,29.53 -159.45,51.18
  Top Layer region: -151.57,29.53 -155.51,29.53 -159.45,25.59 -159.45,-9.84 -147.64,-9.84 -147.64,25.59
  Top Layer region: -147.64,51.18 -147.64,29.53 -143.7,25.59 -143.7,-9.84 -139.76,-9.84 -139.76,25.59 -135.83,29.53 -135.83,51.18
  Top Layer region: -127.95,29.53 -131.89,29.53 -135.83,25.59 -135.83,-9.84 -124.02,-9.84 -124.02,25.59
  Top Layer region: -124.02,51.18 -124.02,29.53 -120.08,25.59 -120.08,-9.84 -116.14,-9.84 -116.14,25.59 -112.2,29.53 -112.2,51.18
  Top Layer region: -104.33,29.53 -108.27,29.53 -112.2,25.59 -112.2,-9.84 -100.39,-9.84 -100.39,25.59
  Top Layer region: -194.88,51.18 -194.88,9.84 -198.82,9.84 -198.82,-9.84 -187.01,-9.84 -187.01,25.59 -183.07,29.53 -183.07,51.18
  Top Layer region: 194.88,9.84 194.88,51.18 183.07,51.18 183.07,29.53 187.01,25.59 187.01,-9.84 198.82,-9.84 198.82,9.84
WIRE-TO-BOARD_WE_61231020621 [mm] "WR-BHD 2.54mm Male SMT Box Header (Reel), 10p"
  rect 1.2x4.75 smd: 1(-5.08,-2.875) 2(-5.08,2.875) 3(-2.54,-2.875) 4(-2.54,2.875) 5(0,-2.875) 6(0,2.875) 7(2.54,-2.875) 8(2.54,2.875) 9(5.08,-2.875) 10(5.08,2.875)
  silkscreen extent -10.26,-5.87 10.26,4.47, body extent -10.16,-4.75 10.16,4.76, height 11.35
X2SON-DFN [mil] "X2SON small outline to lead"
  round 1 smd paste-99999 mask-99999: 1(-21.63,12.8) 2(-21.63,-12.8) 3(21.63,-12.8) 4(21.63,12.8)
  rect 22.83x22.83 smd rot 45 paste-99999 mask-99999: 5(0,0)
  Top Layer region: 27.14,-18.9 27.14,-6.69 16.32,-6.69 9.03,-13.98 9.03,-18.9
  Top Layer region: -27.14,-18.9 -27.14,-6.69 -16.32,-6.69 -9.03,-13.98 -9.03,-18.9
  Top Layer region: 27.14,18.9 27.14,6.69 16.32,6.69 9.03,13.98 9.03,18.9
  Top Layer region: -27.14,18.9 -27.14,6.69 -16.32,6.69 -9.03,13.98 -9.03,18.9
  body extent -20,-20 20,20, height 18
XTAL_ECX-2236B2_250X200X60 [mm] "ECX-2236B2 MHz RANGE CRYSTAL UNIT"
  rect 1.2x1 smd: 1(-0.85,-0.65) 2(0.85,-0.65) 3(0.85,0.65) 4(-0.85,0.65)
  body extent -1.25,-1 1.25,1, height 0.6

## Part data
C1 C2: library part CAP_0805_10µ_16V, "Multilayer Ceramic Capacitors MLCC - SMD/SMT 0603 25VDC", Manufacturer 1="Samsung Electro-Mechanics", Manufacturer 1 Prt. Nr.=CL21A106KOQNNNG, Manufacturer 2=KEMET, Manufacturer 2 Prt. Nr.=C0805C106K8PAC7210
C3 C4 C5 C6 C7 C8 C10 C11 C12 C13 C14 C17 C20 C25 C26: library part CAP_0402_100nF_25V, "Multilayer Ceramic Capacitors MLCC - SMD/SMT 0402 25VDC", Manufacturer 1="KYOCERA AVX", Manufacturer 1 Prt. Nr.=KGM05AR71C104KH, Manufacturer 2="Taiyo Yuden", Manufacturer 2 Prt. Nr.=EMK105B7104KV-F
C9 C15: library part CAP_0603_1µ_16V, "Multilayer Ceramic Capacitors MLCC - SMD/SMT 0603 16VDC", Manufacturer 1="Samsung Electro-Mechanics", Manufacturer 1 Prt. Nr.=CL05A105KO5NNNC, Manufacturer 2="Taiyo Yuden", Manufacturer 2 Prt. Nr.=EMK105BJ105KV-F
C16 C19: library part CAP_0402_100pF_50V, "Multilayer Ceramic Capacitors MLCC - SMD/SMT 0402 50VDC", Manufacturer 1="Murata Electronics", Manufacturer 1 Prt. Nr.=GRT1555C1H101JA02D, Manufacturer 2=YAGEO, Manufacturer 2 Prt. Nr.=CC0402JPNPO9BN101
C18 C21 C22: library part CAP_0805_22µ_25V, "Multilayer Ceramic Capacitors MLCC - SMD/SMT 0603 25VDC", Manufacturer 1="Murata Electronics", Manufacturer 1 Prt. Nr.=GRM21BR61E226ME44K, Manufacturer 2=YAGEO, Manufacturer 2 Prt. Nr.=CC0805MKX5R8BB226
C23 C24: library part CAP_0402_13pF_50V, "Multilayer Ceramic Capacitors MLCC - SMD/SMT 0402 50VDC", Manufacturer 1="Murata Electronics", Manufacturer 1 Prt. Nr.=GRT1555C1H130FA02D, Manufacturer 2=YAGEO, Manufacturer 2 Prt. Nr.=CQ0402FRNPO9BN130
J1: library part "Pin Header_2pol_61300211121", "Pin Header 2 Pol 2.54mm", Manufacturer 1="Würth elektronik", Manufacturer 1 Prt. Nr.=61300211121
J2: library part "USB Type Micro USB Connector_629105136821", "WR-COM Micro USB 2.0 SMT Type B Horizontal 5 Contacts", Manufacturer 1="Würth Elektronik", Manufacturer Part Number1=629105136821
J3: library part "FFC Receptable_33pol_FH35C-33S-0.3SHW", Manufacturer 1=N/A, Manufacturer 1 Prt. Nr.=N/A
J4: library part "Wire to Board Connector_5pol_SM05B-SRSS-TB", "Wire to Board Connector 5pol 1.0mm Pitch", Manufacturer 1=JST, Manufacturer 1 Prt. Nr.=SM05B-SRSS-TB
J5: library part "Wire to Board Connector_10pol_61231020621", "Wire to Board Connector 10pol 2.54mm Pitch", Manufacturer 1="Würth Elektronik", Manufacturer 1 Prt. Nr.=61231020621
MP1 MP2 MP3 MP4: "Mounting hole with 1 mm radius"
R1 R2 R6 R9 R26: library part RES_0402_1k_1%, "Thick Film Resistors - SMD 1k 1%", Manufacturer 1="Vishay / Dale", Manufacturer 1 Prt. Nr.=CRCW04021K00FKEDC, Manufacturer 2=YAGEO, Manufacturer 2 Prt. Nr.=RT0402FRE131KL
R3 R4 R5 R27: library part RES_0402_0R_1%, "Thick Film Resistors - SMD 0OHM 1%", Manufacturer 1=Bourns, Manufacturer 1 Prt. Nr.=CR0402AJ/-000GAS, Manufacturer 2=YAGEO, Manufacturer 2 Prt. Nr.=AC0402FR-070RL
R7 R8: library part RES_0402_27R_1%, "Thick Film Resistors - SMD 27R 1%", Manufacturer 1=YAGEO, Manufacturer 1 Prt. Nr.=RC0402FR-0727RL, Manufacturer 2="TE Connectivity Passive Product", Manufacturer 2 Prt. Nr.=CRGCQ0402F27R
R10 R11 R12 R24: library part RES_0402_4k7_1%, "Thick Film Resistors - SMD 4.7k 1%", Manufacturer 1="Vishay / Dale", Manufacturer 1 Prt. Nr.=CRCW04024K70FKEDC, Manufacturer 2=Panasonic, Manufacturer 2 Prt. Nr.=ERJ-PA2F4701X
R13 R14 R15 R16 R17 R18 R19 R20 R21 R22 R23 R25: library part RES_0402_100R_1%, "Thick Film Resistors - SMD 100R 1%", Manufacturer 1="Vishay / Dale", Manufacturer 1 Prt. Nr.=CRCW0402100RFKEDC, Manufacturer 2=YAGEO, Manufacturer 2 Prt. Nr.=RC0402FR-07100RL
R28: library part RES_0402_10k_1%, "Thick Film Resistors - SMD 10k 1%", Manufacturer 1="Vishay / Dale", Manufacturer 1 Prt. Nr.=CRCW040210K0FKEDC, Manufacturer 2=YAGEO, Manufacturer 2 Prt. Nr.=RT0402FRE0710KL
SW1 SW2 SW3 SW4 SW5 SW6: library part "SW_TACTILE_PTS815 SJM 250 SMTR LFS", "SMD Switch Tactile SMD 4,20mm x 3,20mm", Manufacturer 1=C&K, Manufacturer 1 Prt. Nr.="PTS815 SJM 250 SMTR LFS"
U1: library part "LDO 3.3V_TLV74033PDQNR", "LDO voltage regulator 300mA X2SON", Manufacturer 1="Texas Instruments", Manufacturer 1 Prt. Nr.=TLV74033PDQNR
U2: library part uC_32bit_30IO_RP2040_Rev2, "32Bit Microcontroller 30IO 133MHz RP2040", Manufacturer 1="Raspberry Pi Foundation", Manufacturer 1 Prt. Nr.=RP2040
U3: library part "Touch Controller_IQS9150-000QFR", "Projected capacitive trackpad/touchscreen controller with proximity, touch, snap, trackpad / outputs and gestures.", Manufacturer 1=Azoteq, Manufacturer 1 Prt. Nr.=IQS9150-000QFR
U4: library part NOR_Flash_W25Q16JVUXIQ_Rev2, "NOR Flash spiFlash, 3V, 16M-bit, 4Kb Uniform Sector, DTR", Manufacturer 1=Winbond, Manufacturer 1 Prt. Nr.=W25Q16JVUXIQ
XTAL1: library part Crystal_ECX-2236B_12MHz, "SMD Crystal 12 MHz 10pF", Manufacturer 1=ECS, Manufacturer 1 Prt. Nr.=ECS-120-10-36B-CWY-TR3, Temperature Range=-30°C-85°C

## Via types
v1: diameter 0.4, hole 0.2, Top Layer to Bottom Layer, tented both sides, 166 vias
v2: diameter 0.5, hole 0.2, Top Layer to Bottom Layer, 16 vias
v3: diameter 0.5, hole 0.3, Top Layer to Bottom Layer, tented both sides, 1 vias

## Nets (pads, with @x,y where several pads share a name; then routed paths per layer and width w, separated by ;. In a path a pad name is that pad's centre, name@x,y a point inside that pad or via, vN(x,y) a via of type N, cw(c..) or ccw(c..) an arc to the next point about the centre after c; other vN are vias at no path point)
3V3: C4.1 C5.1 C6.1 C7.1 C8.1 C9.1 C10.1 C11.1 C12.1 C16.1 C17.1 C18.1 C26.1 J4.1 R1.1 R2.1 R3.2 R6.2 R10.2 R11.2 R12.2 R24.2 R27.1 R28.1 U2.1 U2.10 U2.22 U2.33 U2.42 U2.43 U2.44 U2.48 U2.49 U3.5 U4.8 | length 189
  Top Layer w0.15: v1(4.8,12.35) 4.776,12.326 4.776,11.074 8.4,7.45 14.5,7.45 15.54,8.49 R6.2@15.54,9.05 ; v1(4.828,15.39) 4.839,15.4 10.6,15.4 11.6,16.4 11.6,19.1 11.919,19.419 R2.1@12.613,19.419 ; v1@4.9,19.35 v1(4.902,19.348) 4.905,19.345 R1.1@8.2,19.345 ; C7.1@17.9,20.3 U2.10@18.8,20.3 ; C11.1@17.9,23.95 17.95,23.9 U2.1@18.8,23.9 ; 26.36,18.782 26.446,18.696 ; R10.2@36,26.385 42.185,26.385 45.95,30.15 R24.2@45.95,32.65 43.15,32.65 v1(42.5,33.3)
  Top Layer w0.2: v1(7.4,29.2) 12.85,29.2 13.45,28.6 ; R28.1@13.45,27.904 13.45,28.6 ; 14.813,29.194 14.044,29.194 13.45,28.6 ; 14.813,29.2 20.2,29.2 20.827,28.573 C26.1@20.827,27.819 ; 22.325,17.447 U2.22@22.325,17.975 22.325,18.95 ; 22.325,23.475 U2.49@22.325,24.625 22.325,25.153 ; 22.725,23.475 U2.48@22.725,24.625 22.725,25.153 ; 24.325,23.475 U2.44@24.325,24.625 24.325,25.153 ; 24.6,20.3 U2.33@25.45,20.3 C8.1@26.36,20.3 ; 24.725,23.9 U2.43@24.725,24.625 24.725,25.153 ; 24.775,23.9 U2.42@25.45,23.9 25.978,23.9 ; C9.1@26.401,26.325 27.875,26.325 28.564,25.636 R12.2@28.564,24.43 ; 28.559,18.75 R11.2@28.559,22.133 ; C16.1@48.8,21.69 48.8,22.026 U3.5@49.697,22.924
  Top Layer w0.3: v1@16.6,17.7 17.9,19 C7.1@17.9,20.25 ; 21.42,42.195 v1@22.436,42.195 ; v1(23.1,42.2) R27.1@33.245,42.2 ; 26.36,18.782 C8.1@26.36,20.3
  Top Layer w0.5: v1(18.95,3.45) v1(19.8,3.45) 25.3,3.45 27.35,5.5 J4.1@27.35,11.887 ; v1@22.436,42.195 v1@22.441,42.2 ; 26.446,18.696 v1(44.802,18.696)
  Top Layer w0.6: R3.2@12.5,41.225 15.275,41.225 16.25,42.2 22.441,42.2 v1(23.1,42.2)
  Bottom Layer w0.15: 23.3,44.75 37.85,44.75 42.5,40.1 v1(42.5,33.3)
  Bottom Layer w0.2: 5.45,28.1 6.3,28.1 v1(7.4,29.2)
  Bottom Layer w0.5: 16.587,3.371 16.587,15.726 16.611,15.75 v1@16.611,17.706
  other v1: 16.615,17.71 45.45,18.7 44.816,19.3 45.453,19.289 21.786,42.212 22.436,42.212
3V3_REG: C2.1 C3.1 R3.1 TP_1.TP U1.1 | length 1.5
  Top Layer w0.15: TP_1.TP@10.5,40.275 C2.1@10.5,41.8
/USB_BOOT_IN: J2.4 R26.1 SW6.1 | length 17.9
  Top Layer w0.15: J2.4@4.925,36 6.1,36 6.7,35.4 6.7,31.2 7.25,30.65 ; SW6.1@8.175,30.65 7.25,30.65 ; R26.1@13.445,27.104 11.746,27.104 11.25,27.6 7.15,27.6 6.7,28.05 6.7,30.1 7.25,30.65